# Altium PCB tach key H-4key2.PcbDoc
Units mm, origin at the board's own origin, x right, y up, seen from the top; angles counter-clockwise.
Board outline 264.23 x 97.21 mm, 2 copper layers (Top Layer, Bottom Layer); 83 components, 54 nets, 241 pads, 0 vias.
Unrouted connection lines stored in the file: 12.
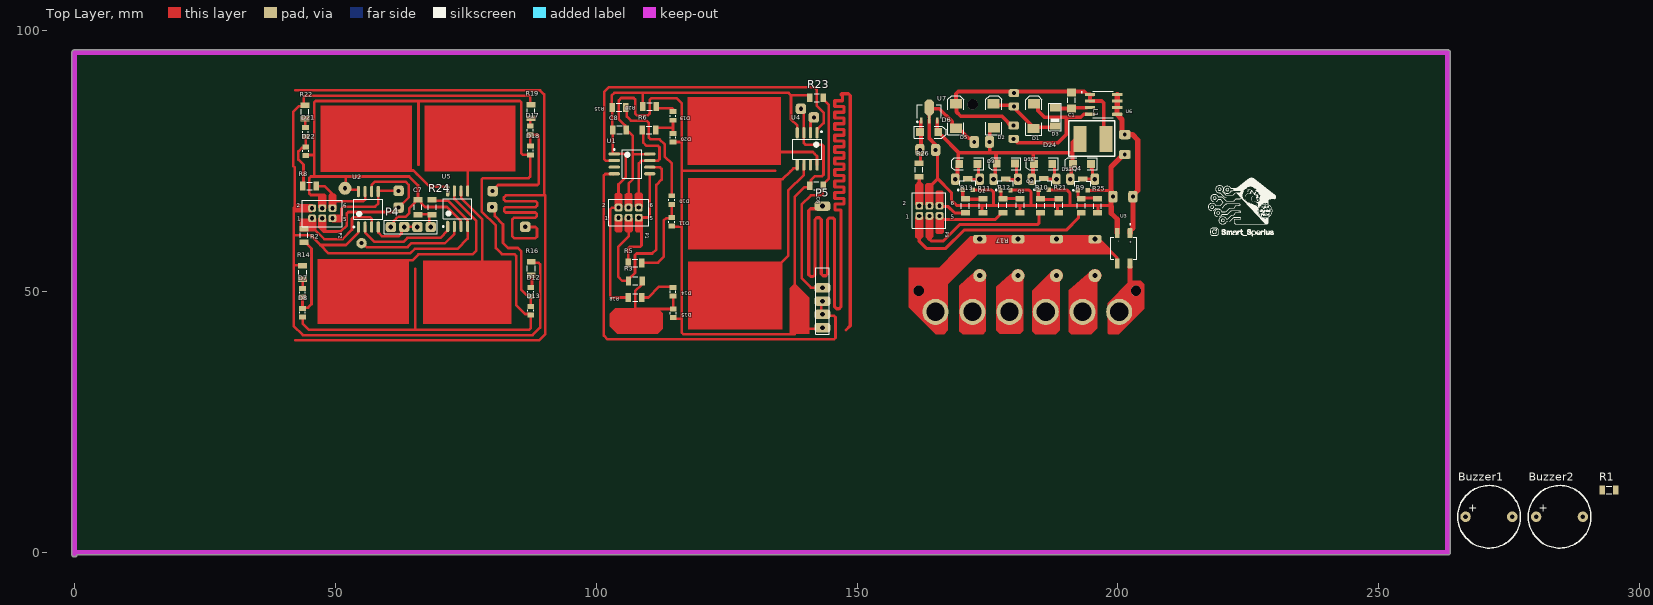
[diagram p0: Top Layer view]
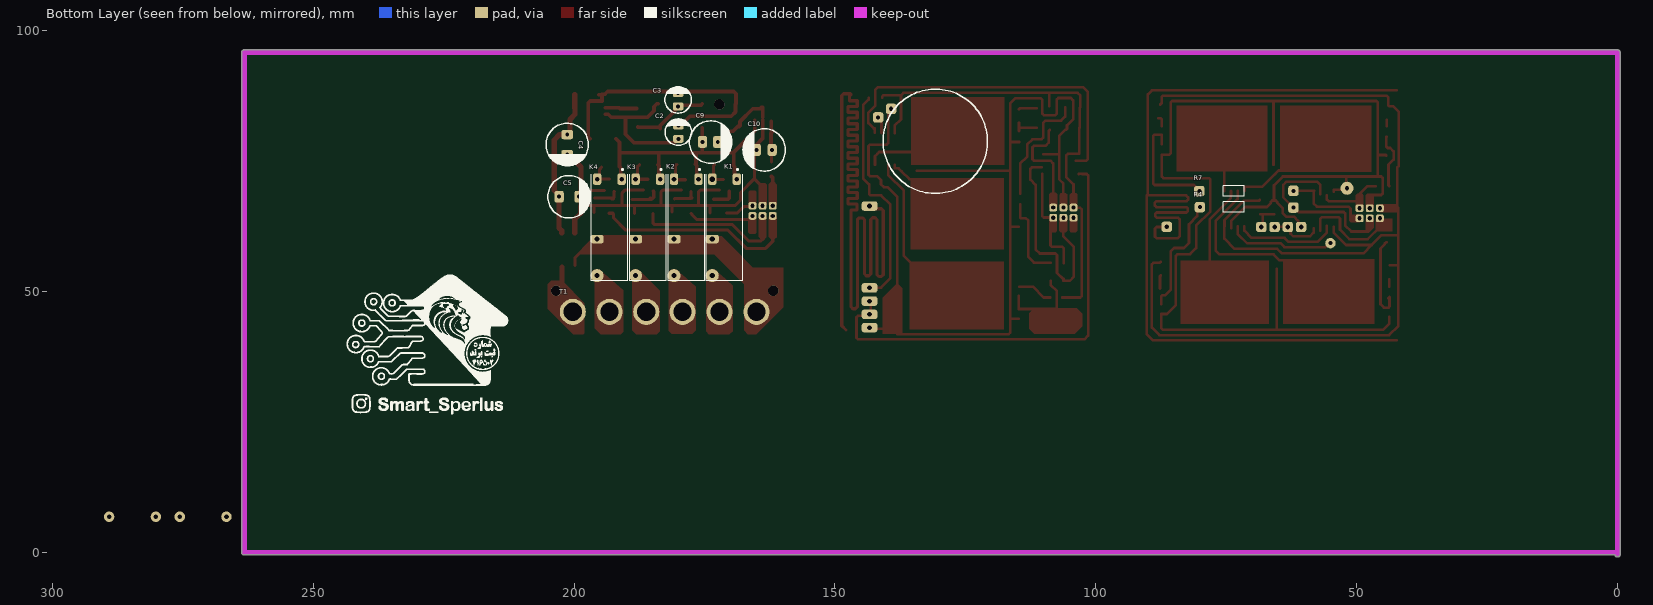
[diagram p1: Bottom Layer view, seen from below]
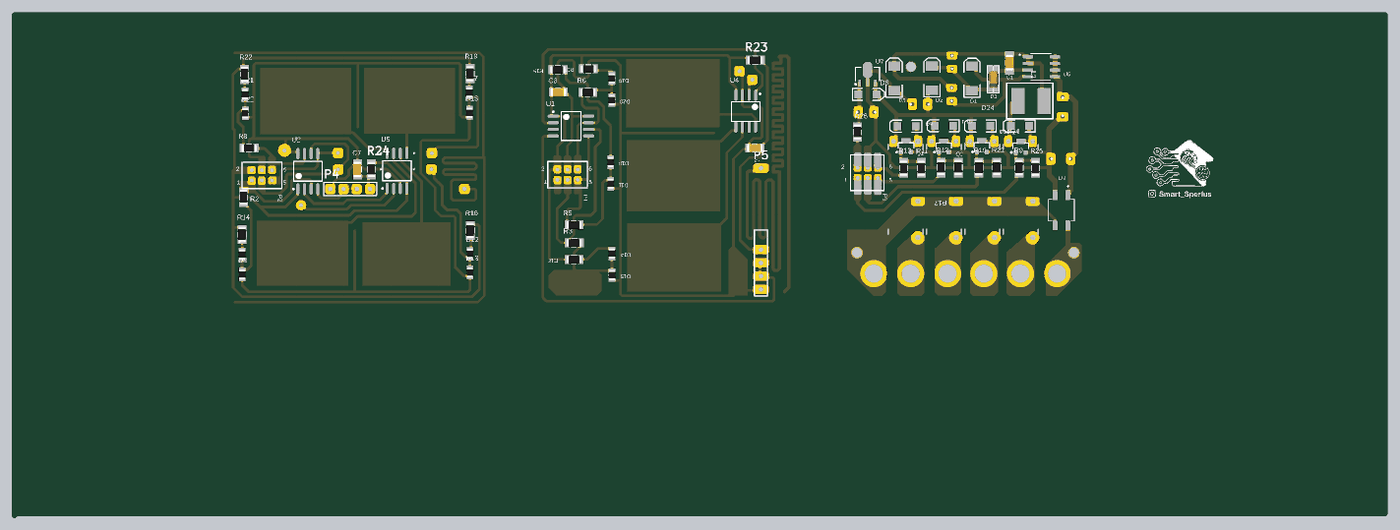
[diagram p2: 3D render of the assembled board from above, using the file's embedded part models]
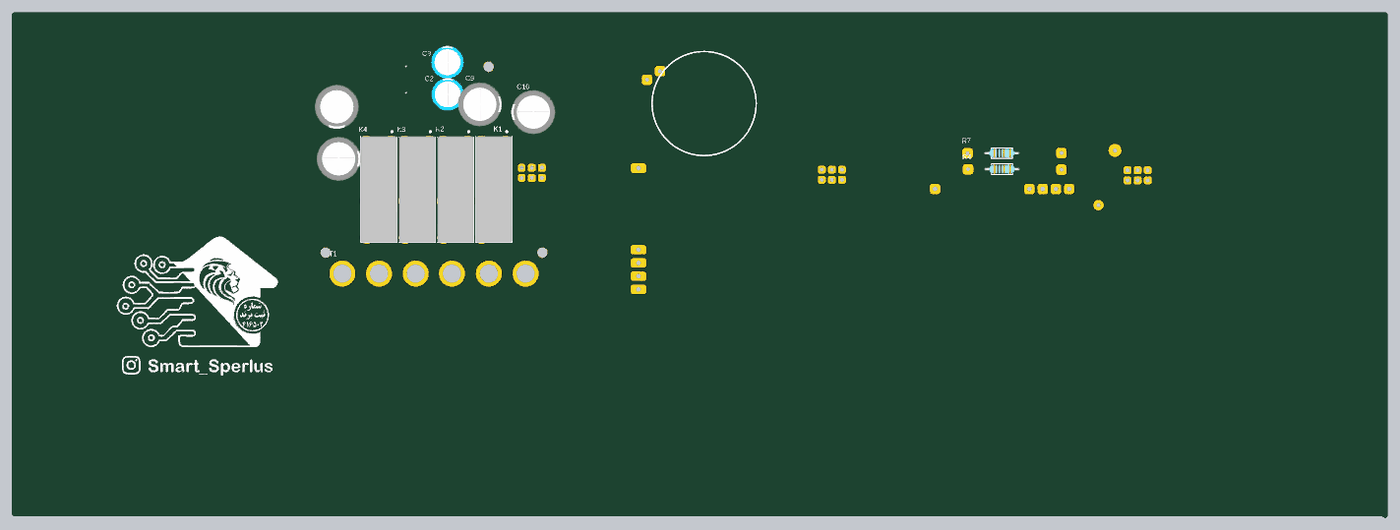
[diagram p3: 3D render of the assembled board from below, using the file's embedded part models]

## Layer stack, top to bottom
Top Solder: solder mask 0.0102, Solder Resist, Dk 3.5
Top Layer: signal copper 0.0356
Dielectric 1: dielectric 0.32, FR-4, Dk 4.8
Bottom Layer: signal copper 0.0356
Bottom Solder: solder mask 0.0102, Solder Resist, Dk 3.5

## Board outline
-0.5,-0.381 -0.5,95.825 cw(c0,95.825) 0,96.325 263.225,96.325 cw(c263.225,95.825) 263.725,95.825 263.725,0 cw(c263.225,0) 263.225,-0.5 0.486,-0.5 cw(c0,-0.381)

## Design rules (kind name [scope] priority, off if disabled: settings)
Clearance Clearance_1 [InPolygon] p1: gap=0.8 ignorepadtopadclearanceinfootprint=FALSE
Clearance [All] p2: gap=0.254 ignorepadtopadclearanceinfootprint=FALSE except(0: Arc-Hole Track-Hole SMDPad-Hole THPad-Hole Via-Hole Fill-Hole Poly-Hole Region-Hole Text-Hole; 0.5: Arc-Arc Arc-Track Arc-SMDPad Arc-THPad Arc-Via Track-Track Track-SMDPad Track-THPad Track-Via SMDPad-SMDPad SMDPad-THPad SMDPad-Via THPad-THPad THPad-Via Via-Via)
PolygonConnect [All] p1: connectstyle=Relief reliefconductorwidth=0.254 reliefentries=4 polygonreliefangle="90 Angle" airgapwidth=0.254
RoomDefinition "tach key H-4key" [InComponentClass('tach key H-4key')] p1: confinementstyle=ConfineIn formatcopy=TRUE lockcomponents=FALSE outline 144.907,-4.953 247.904,-4.953 247.904,23.114 144.907,23.114
RoutingLayers [All] p1: top layer_v5=FALSE bottom layer_v5=TRUE
RoutingVias [All] p1: holewidth=0.711 width=2.5 viastyle="Through Hole" minholewidth=0.711 minwidth=1.27 maxholewidth=0.711 maxwidth=2
SolderMaskExpansion [All] p1: expansion=0.102 istentingtop=FALSE
SupplyNets "Schematic Supply Nets_2" [InNet('GND')] p1: voltage=0.000
SupplyNets "Schematic Supply Nets_1" [InNet('+12v')] p2: voltage=0.000
SupplyNets "Schematic Supply Nets" [InNet('vcc')] p3: voltage=0.000
Width [All] p1: maxlimit=3 minlimit=0.5 preferedwidth=1
29 further rules are at their usual default settings.

## Components (designator, comment, footprint, x,y, rotation, side; value= is the part's Value field where it differs from the comment)
Buzzer1 "Buzzer" BUZZER 271.154,6.825 r0 top
Buzzer2 "Buzzer" BUZZER 284.68,6.825 r0 top
C1 "=Value" "CAP 1206"#1 191.125,86.625 r90 top
C2 "=Value" ELEC-CAP-RAD10-20 180.025,80.55 r270 bottom
C3 "=Value" ELEC-CAP-RAD10-20 180.075,86.75 r270 bottom
C4 "=Value" ELEC-CAP-RAD15-30#1 201.325,78.175 r90 bottom
C5 "=Value" ELEC-CAP-RAD15-30#1 200.975,68.175 r0 bottom
C6 "=Value" "CAP 1206"#2 142.175,70.275 r0 top
C7 "=Value" "CAP 1206"#3 65.85,66.175 r270 top
C8 "=Value" "CAP 1206"#2 104.425,81 r0 top
C9 "=Value" ELEC-CAP-RAD15-30#2 173.85,78.65 r0 bottom
C10 "=Value" ELEC-CAP-RAD15-30#3 163.575,77.15 r180 bottom
D1 "D Schottky" SMB#1 183.9,83.6 r90 top
D2 "D Schottky" SMB#2 176.225,83.625 r90 top
D3 "Zener Diode" DO-35 188.002,85.99 r270 top
D5 "D Schottky" SMB#3 168.95,83.6 r90 top
D6 "D Tunnel1" 3.2X1.6X1.1 163.825,80.575 r0 top
D7 "MODEL" "RES 0805 (2012X06L)" 43.7,49.766 r270 top
D8 "MODEL" "RES 0805 (2012X06L)" 43.725,45.95 r270 top
D9 "D Tunnel1" 3.2X1.6X1.1 171.35,74.45 r180 top
D10 "MODEL" "RES 0805 (2012X06L)" 114.5,67.525 r270 top
D11 "MODEL" "RES 0805 (2012X06L)" 114.5,63.35 r270 top
D12 "MODEL" "RES 0805 (2012X06L)" 87.475,49.9 r270 top
D13 "MODEL" "RES 0805 (2012X06L)" 87.475,46.325 r270 top
D14 "MODEL" "RES 0805 (2012X06L)" 114.75,49.95 r270 top
D15 "MODEL" "RES 0805 (2012X06L)" 114.775,45.825 r270 top
D16 "D Tunnel1" 3.2X1.6X1.1 178.525,74.525 r180 top
D17 "MODEL" "RES 0805 (2012X06L)" 87.35,80.9 r270 top
D18 "MODEL" "RES 0805 (2012X06L)" 87.4,77.025 r270 top
D19 "MODEL" "RES 0805 (2012X06L)" 114.725,83.65 r270 top
D20 "MODEL" "RES 0805 (2012X06L)" 114.725,79.475 r270 top
D21 "MODEL" "RES 0805 (2012X06L)" 44.275,80.575 r270 top
D22 "MODEL" "RES 0805 (2012X06L)" 44.325,76.9 r270 top
D23 "D Tunnel1" 3.2X1.6X1.1 185.675,74.475 r180 top
D24 "D Tunnel1" 3.2X1.6X1.1 193.125,74.475 r180 top
K1 "1-1721081-2" TE_1-1721081-2#1 171.175,62.3 r270 bottom
K2 "1-1721081-2" TE_1-1721081-2#2 178.5,62.3 r270 bottom
K3 "1-1721081-2" TE_1-1721081-2#2 185.875,62.3 r270 bottom
K4 "1-1721081-2" TE_1-1721081-2#2 193.25,62.3 r270 bottom
L1 "1mH" HS1101 195.25,79.275 r0 top
P1 "Header 3X2" HDR2X3 103.685,63.85 r0 top
P2 "Header 3X2" HDR2X3 44.96,63.735 r0 top
P3 "Header 3X2" HDR2X3 161.335,64.21 r0 top
P4 "Header 5" HDR1X5#1 60.65,62.375 r0 top
P5 "Header 5" HDR1X5#2 143.375,43.085 r90 top
Q1 "QNPN" SOT-23B_L 171.225,70.55 r90 top
Q2 "QNPN" SOT-23B_L 178.475,70.525 r90 top
Q3 "QNPN" SOT-23B_L 185.8,70.575 r90 top
Q4 "QNPN" SOT-23B_L 193.275,70.475 r90 top
R1 "10K" "RES 1206 (3216X08L)"#1 294.13,11.95 r0 top
R2 "10K" "RES 1206 (3216X08L)"#1 44,60.776 r90 top
R3 "10K" "RES 1206 (3216X08L)"#1 107.5,52.05 r180 top
R4 "10K" Res-(1/4)#1 73.55,66.2 r180 bottom
R5 "10K" "RES 1206 (3216X08L)"#1 107.455,55.475 r180 top
R6 "10K" "RES 1206 (3216X08L)"#1 110.13,80.975 r180 top
R7 "10K" Res-(1/4)#2 73.585,69.275 r180 bottom
R8 "10K" "RES 1206 (3216X08L)"#1 45.05,70.225 r0 top
R9 "10K" "RES 1206 (3216X08L)"#2 192.975,66.475 r270 top
R10 "10K" "RES 1206 (3216X08L)"#2 185.2,66.475 r270 top
R11 "10K" "RES 1206 (3216X08L)"#3 174.15,66.375 r270 top
R12 "10K" "RES 1206 (3216X08L)"#4 177.95,66.525 r270 top
R13 "10K" "RES 1206 (3216X08L)"#5 170.78,66.4 r270 top
R14 "10K" "RES 1206 (3216X08L)"#1 43.725,53.625 r90 top
R15 "10K" "RES 1206 (3216X08L)"#1 104.375,85.3 r180 top
R16 "10K" "RES 1206 (3216X08L)"#1 87.55,54.4 r90 top
R17 "10K" "RES 1206 (3216X08L)"#4 181.275,66.525 r270 top
R18 "10K" "RES 1206 (3216X08L)"#1 107.48,48.85 r180 top
R19 "10K" "RES 1206 (3216X08L)"#1 87.5,84.55 r90 top
R20 "10K" "RES 1206 (3216X08L)"#1 110.23,85.475 r180 top
R21 "10K" "RES 1206 (3216X08L)"#4 188.675,66.525 r270 top
R22 "10K" "RES 1206 (3216X08L)"#1 44.2,84.4 r90 top
R23 "10K" "RES 1206 (3216X08L)"#1 142.27,87.161 r180 top
R24 "10K" "RES 1206 (3216X08L)"#6 68.55,66.15 r90 top
R25 "10K" "RES 1206 (3216X08L)"#3 196.1,66.375 r270 top
R26 "10K" "RES 1206 (3216X08L)"#1 161.875,73.325 r90 top
T1 "Phoenix terminal" "phoenix terminal 6" 199.116,34.429 r180 bottom
U1 "ATtiny15L-1SC" 8S2_N#1 106.875,74.475 r0 top
U2 "ATtiny15L-1SC" 8S2_N#1 56.325,65.775 r90 top
U3 "MB6S" SOIC245P670X270-4N 201.1,58.3 r270 top
U4 "ATtiny15L-1SC" 8S2_N#2 140.45,77.25 r270 top
U5 "ATtiny15L-1SC" 8S2_N#1 73.445,65.875 r90 top
U6 "HT7A6312" SOIC127P599X175-8N 197.13,85.885 r0 top
U7 "LM1117MP-3.3" SOT89L 163.85,84.475 r90 top

## Footprints (in the part's own frame and the unit in brackets; to place one, negate y for a bottom-side part, rotate by r counter-clockwise, add the part's x,y. Pads: shape width x height; smd on the part's side, far side on the other; paste and mask are expansions set on the pad)
3.2X1.6X1.1 [mm] "SMT LED; 2 Flat Leads"
  rect 1.5x1.5 smd: 1(-1.75,0) 2(1.75,0)
  silkscreen extent -2.9,-1.15 3.27,1.15
8S2_N#1 [mm] "SOP, 8-Leads, Body 5.3x5.3mm, Pitch 1.27mm, IPC Medium Density"
  oval 2.2x0.6 smd: 1(-3.4,1.905) 2(-3.4,0.635) 3(-3.4,-0.635) 4(-3.4,-1.905) 5(3.4,-1.905) 6(3.4,-0.635) 7(3.4,0.635) 8(3.4,1.905)
  silkscreen extent -3.52,-2.75 1.9,2.88, body extent -2.73,-2.75 2.73,2.75, height 2.16
8S2_N#2 [mm] "SOP, 8-Leads, Body 5.3x5.3mm, Pitch 1.27mm, IPC Medium Density"
  oval 2.2x0.6 smd: 1(-3.175,1.905) 2(-3.175,0.635) 3(-3.175,-0.635) 4(-3.175,-1.905) 5(2.975,-1.905) 6(2.975,-0.635) 7(2.975,0.635) 8(2.975,1.905)
  silkscreen extent -3.52,-2.75 1.9,2.88, body extent -2.73,-2.75 2.73,2.75, height 2.16
BUZZER [mm] "BUZZER"
  round 2 hole 0.9: 1(-4.5,0) 2(4.45,0)
  silkscreen extent -6,-6 6,6
"CAP 1206"#1 [mm]
  rect 1.5x1.7 smd: 1(-1.524,0) 2(1.524,0)
  silkscreen extent -0.47,-0.75 0.53,0.75, body extent -1.49,-0.77 1.55,0.75, height 0.75
"CAP 1206"#2 [mm]
  rect 1.05x1.7 smd: 1(-1.27,0) 2(1.326,0)
  silkscreen extent -0.47,-0.75 0.53,0.75, body extent -1.49,-0.77 1.55,0.75, height 0.75
"CAP 1206"#3 [mm]
  rect 1.05x1.7 smd: 1(-1.376,0) 2(1.425,0)
  silkscreen extent -0.47,-0.75 0.53,0.75, body extent -1.49,-0.77 1.55,0.75, height 0.75
DO-35 [mm]
  rect 1.397x2 smd: 1(0.765,-0.027) 2(4.265,-0.027)
  silkscreen extent -0.07,-1.2 5.15,1.15, body extent -0.17,-0.81 5.35,0.84, height 1.81
ELEC-CAP-RAD10-20 [mil]
  rrect50% 60x80 hole 30: 1(-50,0) 2(50,0)
  silkscreen extent -100,-100 100,100, body extent -124,-124 124,124, height 404
ELEC-CAP-RAD15-30#1 [mil]
  rrect50% 70x90 hole 30: 1(-75,0) 2(75,0)
  silkscreen extent -160,-160 160,160, body extent -167,-167 167,167, height 609
ELEC-CAP-RAD15-30#2 [mil]
  rrect50% 70x90 hole 30: 1(-54.13,-0.98) 2(61.02,-1.97)
  silkscreen extent -160,-160 160,160, body extent -167,-167 167,167, height 609
ELEC-CAP-RAD15-30#3 [mil]
  rrect50% 70x90 hole 30: 1(-59.06,0) 2(60.04,0)
  silkscreen extent -160,-160 160,160, body extent -167,-167 167,167, height 609
HDR1X5#1 [mm] "Connector; Header; 5 Position"
  rrect50% 2x2 hole 0.9: 1(0,0) 2(2.54,0) 3(5.08,0) 4(7.62,0) 5(25.755,0.025)
  silkscreen extent -1.27,-1.27 8.89,1.27
HDR1X5#2 [mm] "Connector; Header; 5 Position"
  rrect50% 1.8x3 hole 0.9: 1(0,0) 2(2.54,0) 3(5.08,0) 4(7.62,0) 5(23.3,0)
  silkscreen extent -1.27,-1.27 11.43,1.27
HDR2X3 [mm] "Connector; Header; 3x2 Position"
  rrect50% 1.5x1.5 hole 0.8: 1(0.6,0.3) 2(0.6,2.24) 3(2.54,0.3) 4(2.54,2.24) 5(4.48,0.3) 6(4.48,2.24)
  silkscreen extent -1.27,-1.27 6.35,3.81
HS1101 [mm] "HUMIDITY SENSOR"
  rect 2.5x5 smd: 1(2.5,0) 2(-2.5,0)
"phoenix terminal 6" [mm] "6 terminals"
  round 5 hole 3.5: 1(-1.143,11.684) 2(5.897,11.684) 3(12.937,11.684) 4(19.897,11.684) 5(26.997,11.684) 6(34.057,11.684)
"RES 0805 (2012X06L)" [mm] "Chip Resistor, 2-Leads, Body 2.0x1.3mm, IPC High Density _ (0.100 W)"
  rect 0.95x1.3 smd: 1(-0.838,0) 2(0.812,0)
  silkscreen extent -0.16,-0.55 0.14,0.55, body extent -1.03,-0.63 1,0.64, height 0.6
"RES 1206 (3216X08L)"#1 [mm] "Chip Resistor, 2-Leads, Body 3.2x1.6mm, IPC High Density _ (0.125 W)"
  rect 1.05x1.7 smd: 1(-1.295,0) 2(1.301,0)
  silkscreen extent -0.5,-0.75 0.5,0.75, body extent -1.52,-0.76 1.53,0.76, height 0.6
"RES 1206 (3216X08L)"#2 [mm] "Chip Resistor, 2-Leads, Body 3.2x1.6mm, IPC High Density _ (0.125 W)"
  rect 1.05x1.7 smd: 1(-1.325,0) 2(1.401,0)
  silkscreen extent -0.5,-0.75 0.5,0.75, body extent -1.52,-0.76 1.53,0.76, height 0.6
"RES 1206 (3216X08L)"#3 [mm] "Chip Resistor, 2-Leads, Body 3.2x1.6mm, IPC High Density _ (0.125 W)"
  rect 1.05x1.7 smd: 1(-1.425,0) 2(1.301,0)
  silkscreen extent -0.5,-0.75 0.5,0.75, body extent -1.52,-0.76 1.53,0.76, height 0.6
"RES 1206 (3216X08L)"#4 [mm] "Chip Resistor, 2-Leads, Body 3.2x1.6mm, IPC High Density _ (0.125 W)"
  rect 1.05x1.7 smd: 1(-1.275,0) 2(1.451,0)
  silkscreen extent -0.5,-0.75 0.5,0.75, body extent -1.52,-0.76 1.53,0.76, height 0.6
"RES 1206 (3216X08L)"#5 [mm] "Chip Resistor, 2-Leads, Body 3.2x1.6mm, IPC High Density _ (0.125 W)"
  rect 1.05x1.7 smd: 1(-1.4,0) 2(1.326,0)
  silkscreen extent -0.5,-0.75 0.5,0.75, body extent -1.52,-0.76 1.53,0.76, height 0.6
"RES 1206 (3216X08L)"#6 [mm] "Chip Resistor, 2-Leads, Body 3.2x1.6mm, IPC High Density _ (0.125 W)"
  rect 1.05x1.7 smd: 1(-1.4,0) 2(1.401,0)
  silkscreen extent -0.5,-0.75 0.5,0.75, body extent -1.52,-0.76 1.53,0.76, height 0.6
Res-(1/4)#1 [mm]
  rrect50% 2x2 hole 0.762: 1(-6.525,-0.025) 2(11.425,-0.1)
  silkscreen extent -2.03,-1.02 2.03,1.02, body extent -3.43,-0.92 3.43,0.91, height 2.92
Res-(1/4)#2 [mm]
  rrect50% 2x2 hole 0.762: 1(-6.575,-0.025) 2(11.46,0.025)
  silkscreen extent -2.03,-1.02 2.03,1.02, body extent -3.43,-0.92 3.43,0.91, height 2.92
SMB#1 [mm] "DO-214-AA/SMB; 2 C-Bend Leads; Body 5.3 x 3.6 mm, inc. leads (LxW)"
  rect 1.8x2.3 smd: 1(-2.35,0.025) 2(2.375,0)
  silkscreen extent -3.6,-1.55 3.9,1.55
SMB#2 [mm] "DO-214-AA/SMB; 2 C-Bend Leads; Body 5.3 x 3.6 mm, inc. leads (LxW)"
  rect 1.8x2.3 smd: 1(-2.254,0) 2(2.371,0.025)
  silkscreen extent -3.58,-1.55 3.95,1.55
SMB#3 [mm] "DO-214-AA/SMB; 2 C-Bend Leads; Body 5.3 x 3.6 mm, inc. leads (LxW)"
  rect 1.8x2.3 smd: 1(-2.325,-0.05) 2(2.375,-0.025)
  silkscreen extent -3.57,-1.55 3.95,1.55
SOIC127P599X175-8N [mm]
  rrect25% 1.97x0.6 smd: 1(-2.47,1.905) 2(-2.47,0.635) 3(-2.47,-0.635) 4(-2.47,-1.905) 5(2.745,-1.905) 6(2.745,-0.635) 7(2.745,0.635) 8(2.745,1.905)
  silkscreen extent -4.14,-2.52 1.95,2.52
SOIC245P670X270-4N [mm]
  rrect23% 1.91x0.91 smd: 1(-2.9,1.225) 2(-2.9,-1.225) 3(2.9,-1.225) 4(2.9,1.225)
  silkscreen extent -4.68,-2.48 2.1,2.48
SOT89L [mm] "SOT89, 3-Leads, Body 4.5x2.4 mm, Pitch 1.5mm, Lead Span 4.1mm, IPC High Density"
  rect 1.2x0.5 smd: 1(-1.7,1.5) 3(-1.7,-1.5)
  rect 1.6x0.5 smd: 2(-1.5,0)
  oct 3x1.8 smd: 2(0.8,0)
  silkscreen extent -2.07,-2.3 1.3,2.42, body extent -1.3,-2.3 1.3,2.3, height 1.6
SOT-23B_L [mm] "SOT23, 3-Leads, Body 2.9x1.3mm, Pitch 0.95mm, Lead Span 2.4mm, IPC High Density"
  rect 0.85x0.8 smd: 1(-1.075,0.95) 2(-1.075,-0.95)
  rect 1x1.8 smd: 3(1.075,0)
  silkscreen extent -1.2,-1.5 0.7,1.92, body extent -0.7,-1.5 0.7,1.5, height 1.14
TE_1-1721081-2#1 [mm]
  rrect50% 2.2x1.6 hole 0.9 mask+0.102: 1(-9.25,2.35)
  rrect50% 2.2x1.6 hole 1.1 mask+0.102: 2(-9.25,-2.35)
  rrect50% 1.6x2.5 hole 1 mask+0.102: 3(2.25,-2.35)
  round 2.5 hole 1 mask+0.102: 4(9.25,-2.35)
  silkscreen extent -11.24,-3.5 10.2,3.5, body extent -10.2,-3.5 10.2,3.5, height 14.5
TE_1-1721081-2#2 [mm]
  rrect50% 2.2x1.6 hole 0.9 mask+0.102: 1(-9.25,2.35) 2(-9.25,-2.35)
  rrect50% 1.6x2.5 hole 1 mask+0.102: 3(2.25,-2.35)
  round 2.5 hole 1 mask+0.102: 4(9.25,-2.35)
  silkscreen extent -11.24,-3.5 10.2,3.5, body extent -10.2,-3.5 10.2,3.5, height 14.5

## Part data
C1 C6 C7 C8: library part Capacitor, "Capacitor"
C2 C3 C4 C5 C9 C10: library part "Capacitor Electrolytic", "Electrolytic Capacitor"
D1 D2 D5: "Schottky Diode", Code_JEDEC=DO-214-AA, LatestRevisionDate=17-Jul-2002, LatestRevisionNote="Re-released for DXP Platform.", PackageDescription="DO-214-AA/SMB; 2 C-Bend Leads; Body 5.3 x 3.6 mm, inc. leads (LxW)", PackageReference=SMB, Published=8-Jun-2000, Publisher="Altium Limited", Simulation ModelName=SKYDIODE, Simulation PortMap=(1:1),(2:2)
D6 D9 D16 D23 D24: "Tunnel Diode - RLC Model", LatestRevisionDate=17-Jul-2002, LatestRevisionNote="Re-released for DXP Platform.", PackageDescription="SM LED; 2 Flat Leads", PackageReference=3.2X1.6X1.1, PackageVersion=Feb-2002, Published=8-Jun-2000, Publisher="Altium Limited", Simulation ModelName=DTUNNEL1, Simulation PortMap=(1:1),(2:2)
D7 D8 D10 D11 D12 D13 D14 D15 D17 D18 D19 D20 D21 D22: library part "LED 5mm", "Typical LED", COLOR=RED
K1 K2 K3 K4: "General Purpose Relay SPST-NO (1 Form A) 12VDC Coil Through Hole", Package=None, Check_prices=https://www.snapeda.com/parts/1-1721081-2/TE+Connectivity+Potter+%2526+Brumfield+Relays/view-part/?ref=eda, MF="TE Connectivity", MP=1-1721081-2, SnapEDA_Link=https://www.snapeda.com/parts/1-1721081-2/TE+Connectivity+Potter+%2526+Brumfield+Relays/view-part/?ref=snap
L1: library part Inductor, "Inductor", Code_IEC=1005, Code_JEITA=0402, LatestRevisionDate=17-Jul-2002, LatestRevisionNote="Re-released for DXP Platform.", PackageReference=0402-A, Published=8-Jun-2000, Publisher="Altium Limited", Simulation ModelName=INDUCTOR, Simulation PortMap=(1:1),(2:2)
P1 P2 P3: "Header, 3-Pin, Dual row", LatestRevisionDate=17-Jul-2002, LatestRevisionNote="Re-released for DXP Platform.", Publisher="Altium Limited"
P4 P5: "Header, 5-Pin", LatestRevisionDate=17-Jul-2002, LatestRevisionNote="Re-released for DXP Platform.", Publisher="Altium Limited"
Q1 Q2 Q3 Q4: "NPN Bipolar Transistor", LatestRevisionDate=29-May-2009, LatestRevisionNote="IPC-7351 Footprint Added.", PackageDescription="3-Pin SOT-23 Package 0.95 mm Pitch, 2.4 mm Lead Span", PackageReference=SOT-23B, PackageVersion=Aug-1999, Published=8-Jun-2000, Publisher="Altium Limited", Simulation ModelName=QNPN, Simulation PortMap=(1:1),(2:2),(3:3)
R1 R2 R3 R4 R5 R6 R7 R8 R9 R10 R11 R12 R13 R14 R15 R16 R17 R18 R19 R20 R21 R22 R23 R24 R25 R26: library part Resistor, "Resistor", Power="1/4 W", Tolerance=5%, Simulation ModelName="Model Name", Simulation PortMap=(1:1),(2:2)
T1: library part "Phoenix terminal 6", "Terminal 6 Pin", ComponentLinkURL=www.picpars.com, Designer="Seyed Mohsen Ghasemain", E-mail=picpars@gmail.com
U1 U2 U4 U5: "8-Bit AVR Microcontroller with 1K Byte of Flash Memory", Supplier Part Number 1=ATTINY15L-1SC-ND, ComponentLink1Description=Datasheet, ComponentLink1URL=http://www.atmel.com/dyn/resources/prod_documents/doc1187.pdf, ComponentLink2Description="Atmel.com Home", ComponentLink2URL=http://www.atmel.com, DatasheetVersion=1187E-AVR-06/02, LatestRevisionDate=16-Oct-2006, LatestRevisionNote="IPC-7351 Footprint Added.", PackageDescription="8-Lead, 0.208\" Body, Plastic Small Outline Package (EIAJ)", PackageReference=8S2, PackageVersion="revF, Apr-2008", Published=17-Sep-2003, Publisher="Altium Limited", Supplier 1=Digi-Key, Supplier 2=Mouser, Supplier Part Number 2=556-ATTINY15L1SC
U3: "Bridge Rectifier Single Phase Standard 600V Surface Mount 4-SOIC", Package="BESOP-4 Surge Components", Digi-Key_Part_Number=MB6SCT-ND, Digi-Key_Purchase_URL=https://www.digikey.com.tr/product-detail/en/on-semiconductor/MB6S/MB6SCT-ND/965654?utm_source=snapeda&utm_medium=aggregator&utm_campaign=symbol, MF="ON Semiconductor", MP=MB6S, SnapEDA_Link=https://www.snapeda.com/parts/MB6S/ON%20Semiconductor/view-part/2774209/?ref=snap
U6: library part Component_1
U7: "800mA Low-Dropout Linear Regulator", DigiKeyPartNumber=LM1117MP-3.3CT-ND, Manufacturer="National Semiconductor", PackageTopMarking=XYTT*N05A, PowerWise=N, Code_IPC=SOT223-4, Code_JEDEC=TO-261-AA, ComponentLink1Description="LM1117 Datasheet", ComponentLink1URL=http://www.national.com/ds/LM/LM1117.pdf, ComponentLink2Description="LM1117 Web Page", ComponentLink2URL=http://www.national.com/pf/LM/LM1117.html, ComponentLink3Description="MP04A Package Page", ComponentLink3URL=http://www.national.com/packaging/folders/mp04a.html, CompType="LDO IC", DatasheetVersion=Apr-2006, PackageDescription="Molded SOT-223, 6.50 x 3.56 x 1.6mm Body, 4 Lead, 2.3mm Pitch", PackageReference=MP04A, PackageVersion="revB, Apr-2003", PartNumber=LM1117MP-3.3, PinCount=4, Published=4-Dec-2008, Publisher="Altium Limited", RoHS=O
Buzzer1 Buzzer2: ComponentLinkURL=www.picpars.com, Designer="Seyed Mohsen Ghasemain"
D3: MODEL=1N

## Free pads (board coordinates)
  round 2 hole 2: 156(161.825,50.15) 156(172.175,85.875) 157(203.475,50.15)
  round 2 hole 0.8: 158(55.025,59.275)
  round 2.5 hole 0.8: 159(51.85,69.8)
  rrect50% 2x2 hole 0.8: 160(139.25,85.025) 161(141.725,83.375)

## Nets (pads, with @x,y where several pads share a name; then routed paths per layer and width w, separated by ;. In a path a pad name is that pad's centre, name@x,y a point inside that pad or via, vN(x,y) a via of type N, cw(c..) or ccw(c..) an arc to the next point about the centre after c; other vN are vias at no path point)
+12v: C9.2 D2.1 D6.2 D9.2 D16.2 D23.2 D24.2 K1.1 K2.1 K3.1 K4.1 L1.2 U7.3 | length 57.6
  Top Layer w0.7: U7.3 165.35,80.8 D6.2 ; D6.2@166.175,79.95 169.55,76.575 175.475,76.575 176.65,76.575 ; K1.1 169.25,71.975 169.25,73.925 D9.2@169.625,74.3 ; D9.2@169.375,74.3 169.375,76.75 ; C9.2 175.475,78.625 175.475,76.625 ; D2.1@175.45,81.371 175.475,81.346 C9.2@175.475,79.1 ; K2.1 176.5,71.9 176.5,74.075 176.8,74.375 176.65,74.525 176.65,76.575 ; K3.1 183.725,71.75 183.725,74.1 183.95,74.325 183.775,74.5 183.775,76.575 ; K4.1 191.062,71.712 191.062,73.712 191.225,73.875 191.3,73.95 191.3,76.575 ; L1.2@191.975,79.3 191.3,78.625 191.3,76.575 ; 176.65,76.575 183.775,76.575 ; 183.775,76.575 191.3,76.575
biz1: Buzzer1.1 pad.158 U5.2 | length 20.5
  Top Layer w0.5: pad.158 56,58.525 63.825,58.525 64.525,59.225 70.975,59.225 72.81,61.06 U5.2
biz2: pad.161 R1.2 U4.2 | length 3.2
  Top Layer w0.6: U4.2 141.085,82.535 141.4,82.85 pad.161
data: U1.2 U4.1 | length 66.1
  Top Layer w0.5: U1.2@103.819,75.091 102.585,75.091 102.579,75.085 101.818,75.085 101.525,75.378 101.525,88.25 102.45,89.175 141.787,89.175 142.27,88.692 142.27,85.63 143.6,84.3 143.6,82.275 142.569,81.244 142.401,81.244 142.355,81.198 U4.1
data2: U2.2 U5.1 | length 19.5
  Top Layer w0.5: U2.2@55.709,62.634 55.709,61.291 57.425,59.575 63.125,59.575 63.825,60.275 70.125,60.275 71.54,61.69 U5.1
faz: K1.3 K2.3 K3.3 K4.3 T1.6 U3.3 | length 47
  Top Layer w0.6: K4.3 196.038,59.612 196.713,59.612 199.825,56.5 U3.3@199.825,55.05
  Top Layer w1.6: T1.6 165.059,52.234 172.875,60.05 K1.3 K2.3 K3.3 K4.3
GND: Buzzer1.2 Buzzer2.2 C4.1 C5.1 C6.1 C7.1 C8.2 C9.1 C10.1 D5.1 D8.2 D11.2 D13.2 D15.2 D18.2 D20.2 D22.2 P1.4 P2.4 P3.4 P4.1 P5.1 pad.159 pad.160 Q1.2 Q2.2 Q3.2 Q4.2 R11.2 R17.2 R21.2 R25.2 U1.8 U2.8 U3.2 U4.3 U5.3 U7.2 | length 545.3
  Top Layer w0.5: D8.2 43.725,43.9 44.975,42.65 65.325,42.65 ; D22.2 44.418,76.181 45.95,76.181 ; P2.4@47.35,65.998 47.35,68.207 47.057,68.5 45.322,68.5 45.03,68.793 45.03,71.757 45.322,72.05 45.95,72.05 ; U2.8 54.42,69.454 54.374,69.5 52.893,69.5 52.88,69.513 52.137,69.513 pad.159 52.025,69.975 52.025,72.05 ; P4.1@60.59,62.45 61.234,63.094 61.234,63.559 62.025,64.35 63.525,64.35 64.2,65.025 64.2,66 65.25,67.05 65.25,67.17 65.525,67.445 C7.1@65.85,67.445 ; 65.325,54.341 65.325,42.65 ; 65.95,74.285 65.95,86.525 ; U5.3@74.061,62.102 74.061,63.539 71.4,66.2 67.2,66.2 66.45,66.95 66.45,67.17 66.175,67.445 C7.1@65.85,67.445 ; D18.2@87.35,75.963 87.35,72.043 87.057,71.75 78.343,71.75 78.05,71.457 78.05,65.364 80.775,62.639 80.775,58.325 81.95,57.15 84.382,57.15 84.675,56.857 84.675,47.375 86.35,45.7 D13.2@87.475,45.7 ; D18.2 87.225,76.213 87.214,76.203 85.943,76.203 85.65,76.496 85.65,86.232 85.357,86.525 65.95,86.525 ; D13.2 87.475,42.968 87.157,42.65 65.325,42.65 ; C8.2 105.526,81.225 105.526,81.849 104.35,83.025 104.35,86.649 104.801,87.1 107.182,87.1 107.475,86.807 107.475,84.126 107.826,83.775 109.895,83.775 110.246,84.126 110.246,86.682 110.639,87.075 115.4,87.075 116.37,86.105 116.37,78.675 ; C8.2@105.776,81.025 107.025,79.776 107.025,76.345 ; P1.4 106.225,70.725 107.025,71.525 107.025,76.345 ; U1.8@110.05,76.345 107.025,76.345 ; D20.2@114.643,78.675 116.37,78.675 ; D11.2@114.784,62.45 116.37,62.45 ; D15.2@114.827,44.788 115.467,44.788 115.468,44.787 116.37,44.787 ; 134.35,73.125 116.37,73.125 ; pad.160 139.815,84.46 U4.3 ; U4.3@139.8,80.425 139.8,78.468 140.093,78.175 143.282,78.175 143.575,77.882 143.575,72.418 143.282,72.125 141.95,72.125 141.18,71.355 141.18,70.55 140.653,70.023 139.923,70.023 138.075,68.175 138.075,42.9 ; P5.1 143.19,42.9 138.075,42.9 ; 45.95,72.05 45.95,76.181 ; 45.95,72.05 52.025,72.05 ; 45.95,76.181 45.95,86.232 46.243,86.525 65.95,86.525 ; 52.025,72.05 64.164,72.05 65.85,70.364 C7.1 C7.1@65.85,67.445 ; 116.37,44.787 116.4,44.817 116.4,42.143 116.693,41.85 138.075,41.85 138.075,42.9 ; 116.37,44.787 116.37,62.024 116.37,62.45 ; 116.37,62.45 116.37,73.125 ; 116.37,73.125 116.37,78.675
  Top Layer w0.6: P3.4@164.025,66.475 164.025,70.2 165.45,71.625 ; C10.1@165.45,77.15 165.45,71.625 ; Q1.2 175.799,69.475 176.15,69.124 176.15,66.475 ; R11.2@173.95,65.075 173.95,66.475 ; Q2.2 182.999,69.45 183.35,69.099 183.35,66.475 ; R17.2@181.275,65.224 181.275,66.475 ; Q3.2 190.175,69.5 190.85,68.825 190.85,66.475 ; R21.2@188.4,65.016 188.4,66.475 ; Q4.2 198.7,69.4 ; R25.2@196.175,65.153 196.175,66.475 ; 198.7,66.475 196.175,66.475 ; C5.1@198.7,69.2 199.07,69.2 C5.1 ; 165.45,71.625 168.125,68.95 168.125,67.525 169.175,66.475 173.95,66.475 ; 173.95,66.475 176.15,66.475 ; 176.15,66.475 181.275,66.475 ; 181.275,66.475 183.35,66.475 ; 183.35,66.475 188.4,66.475 ; 188.4,66.475 190.85,66.475 ; 190.85,66.475 196.175,66.475
  Top Layer w0.7: U7.2@163.85,83.425 U7.2@163.85,85.275 ; U7.2@163.875,82.95 163.875,79.35 164.969,78.256 164.969,77.631 C10.1@165.45,77.15 ; U7.2@164.075,85.325 164.365,85.035 165.74,85.035 168.2,82.575 168.2,81.825 D5.1@168.375,81.65 ; D5.1@168.6,81.675 D5.1 169.55,80.725 170.077,80.725 171.393,79.41 171.943,79.41 172.425,78.928 C9.1@172.425,78.377
  Top Layer w1: U3.2 199.875,63.85 198.731,64.994 198.731,66.294 198.7,66.325 198.7,66.475 198.7,69.2 198.7,69.4 198.7,73.899 200.682,75.881 200.9,76.099 C4.1@200.9,76.295
NetBuzzer2_1: Buzzer2.1 R1.1
NetC1_1: C1.1 D3.1 U6.3 | length 6.1
  Top Layer w0.7: D3.1@187.982,85.101 191.225,85.101 191.374,85.25 U6.3@194.025,85.25
NetC1_2: C1.2 C2.1 C3.1 D5.2 L1.1 U6.1 U6.2 | length 53.2
  Top Layer w0.7: C2.1@179.413,81.995 179.238,81.995 179.003,82.23 179.003,82.405 177.808,83.6 169.9,83.6 169.065,84.435 169.065,85.885 D5.2 168.975,87.94 169.385,88.35 179.72,88.35 180.125,87.945 180.53,88.35 193.565,88.35 194.025,87.89 194.025,87.84 194.61,87.84 194.71,87.74 U6.1@195.295,87.74 ; U6.1 U6.2 196.915,86.52 197.325,86.11 197.325,79.65 L1.1@196.975,79.3
NetC2_2: C2.2 D1.2 U6.4 | length 26.7
  Top Layer w0.7: C2.2@179.65,79.455 179.887,79.455 180.297,79.045 180.297,78.979 180.726,78.55 188.55,78.55 190.15,80.15 190.15,83.4 ; D1.2 184.142,85.975 184.692,85.425 184.692,84.633 185.925,83.4 190.15,83.4 ; U6.4@194.025,83.98 193.488,83.98 192.908,83.4 190.15,83.4
NetC3_2: C3.2 D1.1 D2.2 D3.2 | length 14.6
  Top Layer w0.7: D2.2@175.425,85.996 175.696,85.725 179.405,85.725 179.675,85.455 179.912,85.455 180.341,85.026 180.341,85.009 183.5,81.85 D1.1@183.5,81.5 ; D1.1@183.5,81.25 183.75,81.5 187.75,81.5 D3.2@187.806,81.556
NetC4_2: C4.2 C5.2 U3.1 U6.5 U6.6 U6.7 U6.8 | length 29.8
  Top Layer w1: U6.6@199.82,85.25 199.82,83.98 200.803,82.997 200.803,80.104 202.792,80.104 203.825,79.072 203.825,69.374 C5.2@202.88,68.429 ; U6.6 U6.8 ; U3.1 202.37,61.245 202.37,61.655 202.88,62.165 C5.2
NetD7_1: D7.1 R14.1 | length 1.9
  Top Layer w0.5: D7.1@43.75,50.897 R14.1@43.75,51.93 ; R14.1@43.75,51.93 43.75,52.387 R14.1@43.75,51.93
NetD9_1: D9.1 K1.2 Q1.3 | length 4.8
  Top Layer w0.6: Q1.3@171.415,71.505 K1.2@173.3,71.505 ; D9.1@173.125,74.3 173.3,74.125 173.3,71.775 K1.2
NetD10_1: D10.1 R15.1 | length 22.8
  Top Layer w0.5: R15.1@105.895,85.275 105.895,83.53 106.675,82.75 109.657,82.75 110.104,82.303 110.104,79.496 110.425,79.175 112.175,79.175 113.175,78.175 113.175,75.825 114.5,74.5 D10.1@114.5,68.801
NetD12_1: D12.1 R16.1 | length 2.6
  Top Layer w0.5: R16.1 87.7,52.955 D12.1@87.7,50.577
NetD14_1: D14.1 R18.1 | length 6.7
  Top Layer w0.5: R18.1 110,48.85 112.075,50.925 D14.1@114.652,50.925
NetD16_1: D16.1 K2.2 Q2.3 | length 5.3
  Top Layer w0.6: Q2.3@178.663,71.437 180.737,71.437 K2.2 180.6,71.8 180.6,74.075 D16.1@180.3,74.375
NetD17_1: D17.1 R19.1 | length 2
  Top Layer w0.5: D17.1 87.35,82.98 87.625,83.255 R19.1@88.023,83.255
NetD19_1: D19.1 R20.1 | length 3.5
  Top Layer w0.5: R20.1@111.309,85.17 114.5,85.17 D19.1@114.725,84.945
NetD21_1: D21.1 R22.1 | length 1.2
  Top Layer w0.5: D21.1@44.225,81.667 R22.1@44.225,82.88
NetD23_1: D23.1 K3.2 Q3.3 | length 5.2
  Top Layer w0.6: Q3.3@185.9,71.525 185.913,71.537 188.212,71.537 K3.2 ; D23.1@187.45,74.325 187.875,73.9 187.875,72.111 K3.2@188.225,71.761
NetD24_1: D24.1 K4.2 Q4.3 | length 5
  Top Layer w0.6: Q4.3 K4.2 195.6,71.868 195.124,72.343 195.124,73.476 D24.1@194.725,73.875
NetP3_1: P3.1 R9.2 | length 40
  Top Layer w0.6: P3.1 161.935,59.64 163.3,58.275 167,58.275 170.5,61.775 190.1,61.775 192.463,64.138 192.463,64.849 192.612,64.998 R9.2@193.323,64.998
NetP3_3: P3.3 R10.2 | length 28.8
  Top Layer w0.6: P3.3 163.875,60.051 164.226,59.7 166.525,59.7 169.65,62.825 184.549,62.825 184.9,63.176 R10.2@184.9,64.922
NetP3_5: P3.5 R12.2 | length 12.7
  Top Layer w0.6: P3.5@165.79,64.135 P3.5@165.831,64.135 ; P3.5@165.856,64.51 166.591,63.775 176.45,63.775 177.4,64.725 177.4,64.849 177.501,64.95 R12.2@177.625,64.95
NetP3_6: P3.6 R13.2 | length 5.5
  Top Layer w0.6: P3.6 165.98,66.285 167.49,66.285 168.701,65.074 R13.2
nol: T1.1 U3.4 | length 9.4
  Top Layer w1: T1.1 200.259,46.981 201.976,48.699 201.976,49.527 201.975,49.529 201.975,50.771 202.35,51.146 U3.4@202.35,54.653
o1: P1.6 R6.2 U1.7 | length 21.1
  Top Layer w0.5: P1.6@108.175,66.075 108.175,74.575 108.694,75.094 U1.7@110.05,75.094 ; R6.2 109.025,80.779 109.025,78.55 109.65,77.925 111.857,77.925 112.15,77.632 112.15,75.368 111.857,75.075 111.181,75.075 111.165,75.091 U1.7@110.066,75.091
o2: P1.5 R5.2 U1.5 | length 21.4
  Top Layer w0.5: R5.2@106.125,55.39 106.125,58.282 106.418,58.575 108.407,58.575 108.7,58.868 108.7,63.357 108.588,63.469 108.588,63.727 P1.5 ; P1.5@108.275,64.2 109.982,64.2 110.275,64.493 U1.5
o3: P1.3 R3.2 U1.6 | length 42.7
  Top Layer w0.5: R3.2@106.199,52.375 106.362,52.538 106.474,52.65 106.5,52.65 106.659,52.809 107.45,53.6 107.45,57.007 107.743,57.3 110.725,57.3 111.525,58.1 111.525,70.425 112.55,71.45 112.55,73.528 112.257,73.821 U1.6@110.392,73.821 ; R3.2@106.199,52.435 R3.2 105,52.05 104.2,52.85 104.2,58.546 106.237,60.584 P1.3@106.237,64.15
o11: P2.6 R8.2 U2.7 | length 13.6
  Top Layer w0.5: R8.2@46.351,70.171 47.979,70.171 49.64,68.51 49.64,67.275 ; P2.6 49.64,66.175 49.64,67.275 ; U2.7@55.709,68.459 55.709,68.285 55.714,68.28 55.714,67.639 55.35,67.275 49.64,67.275
o12: P2.5 R7.2 U2.5 | length 17.1
  Top Layer w0.5: P2.5 50.882,64.035 51.175,64.328 51.175,65.907 51.543,66.275 57.618,66.275 58.23,66.887 U2.5 ; U2.5@58.175,69.303 R7.2@62.125,69.303
o13: P2.3 R4.2 U2.6 | length 34.7
  Top Layer w0.5: P2.3@47.4,64.094 47.4,62.075 47.965,61.51 51.035,61.51 52.2,62.675 52.2,64.957 52.493,65.25 61.14,65.25 61.99,66.1 R4.2 64.075,68.05 64.075,70.432 63.457,71.05 57.606,71.05 56.979,70.423 56.979,68.71 U2.6@56.95,68.681
o14: P2.1 R2.2 U2.3 | length 19.4
  Top Layer w0.5: P2.1 45.56,62.39 47.925,60.025 51.375,60.025 53.2,61.85 53.2,63.957 53.493,64.25 56.667,64.25 56.96,63.957 U2.3@56.96,61.666
o21: D19.2 D20.1 R6.1 | length 4.9
  Top Layer w0.5: R6.1@111.377,81.375 114.725,81.375 ; D20.1@114.725,80.77 114.725,81.375 ; 114.725,82.349 114.725,81.375
o22: D10.2 D11.1 R5.1 | length 15.9
  Top Layer w0.5: R5.1@108.676,55.55 111.85,55.55 112.95,56.65 112.95,63.575 113.439,64.064 114.376,64.064 D11.1 ; D11.1@114.5,64.278 D10.2
o23: D14.2 D15.1 R3.1 | length 15.5
  Top Layer w0.5: R3.1@108.645,52.05 108.645,51.27 107.475,50.1 107.475,46.956 107.768,46.663 114.75,46.663 D14.2
o31: D21.2 D22.1 R8.1 | length 10.8
  Top Layer w0.5: R8.1 43.9,70.37 43.9,74.328 42.925,75.303 42.925,76.874 43.564,77.513 44.1,77.513 D22.1 ; D22.1@44.275,77.738 44.3,77.763 44.3,79.624 D21.2@44.275,79.649
o32: D17.2 D18.1 R7.1 | length 21.9
  Top Layer w0.5: R7.1 80.16,69.382 81.203,70.425 88.732,70.425 89.025,70.718 89.025,79.77 88.732,80.063 D17.2@87.7,80.063 ; D18.1@87.35,78.274 D17.2
o33: D12.2 D13.1 R4.1 | length 23
  Top Layer w0.5: R4.1@80.085,66.05 80.575,65.56 80.575,64.45 82.15,62.875 82.15,59.3 83.1,58.35 85,58.35 85.675,57.675 85.675,50.325 86.687,49.313 87.25,49.313 D12.2 ; D13.1@87.45,47.561 D12.2@87.45,49.088
o34: D7.2 D8.1 R2.1 | length 16.4
  Top Layer w0.5: D8.1@43.7,47.15 D7.2@43.7,48.71 ; D7.2 43.855,48.799 D7.2@43.944,48.71 ; D7.2@43.725,48.49 D7.2@43.879,48.644 ; D8.1@43.861,46.924 44.774,46.924 45.425,47.575 45.425,58.25 44.6,59.075 44.6,59.205 44.355,59.45 R2.1@44.225,59.45
o41: Q1.1 R11.1 R13.1 | length 4.5
  Top Layer w0.7: Q1.1@170.275,69.25 170.275,68.28 170.28,68.276 170.28,67.87 170.455,67.695 R13.1@170.985,67.695 ; R13.1@170.84,67.67 173.205,67.67
o42: Q2.1 R12.1 R17.1 | length 4.6
  Top Layer w0.6: R12.1@177.404,67.989 177.573,67.82 R12.1@177.95,67.82 ; Q2.1@177.575,69.175 177.575,68.195 R12.1@177.723,68.048 ; R12.1@177.95,67.811 180.709,67.811 R17.1@180.75,67.77
o43: Q3.1 R10.1 R21.1 | length 5.8
  Top Layer w0.6: R10.1@184.75,67.995 184.75,69.2 Q3.1@184.85,69.3 ; R10.1@184.975,67.77 R10.1@185.3,67.77 ; R10.1@185.425,67.945 185.15,67.67 185.425,67.67 R21.1@188.929,67.67
o44: Q4.1 R9.1 R25.1 | length 5.1
  Top Layer w0.6: Q4.1@192.325,69.2 192.332,69.193 R9.1@192.332,68.07 ; R9.1@192.475,67.745 R9.1@192.8,67.745 ; R9.1@192.575,67.925 R9.1@192.912,67.925 ; R9.1@192.8,67.925 R25.1@196.109,67.925
of1: K1.4 T1.5 | length 7.5
  Top Layer w2.5: T1.5 172.5,46.494 172.5,52.025 K1.4
of2: K2.4 T1.4 | length 7.6
  Top Layer w2.5: T1.4 179.219,51.419 K2.4
of3: K3.4 T1.3 | length 7.3
  Top Layer w2.5: T1.3@186.575,46.425 186.575,47.185 187.625,48.235 187.625,52.45 K3.4
of4: K4.4 T1.2 | length 7.3
  Top Layer w2.5: T1.2@193.869,46.531 193.782,46.618 193.782,47.183 194.75,48.152 194.75,52.2 K4.4
RF: P5.2 P5.3 U1.4 | length 86.8
  Top Layer w0.5: U1.4@103.25,72.535 103.234,72.551 102.585,72.551 102.569,72.535 101.768,72.535 101.475,72.242 101.475,41.55 102.175,40.85 145.582,40.85 145.875,41.143 145.875,45.057 145.582,45.35 P5.2@143.273,45.35 ; P5.2 143.175,45.825 143.175,47.965 P5.3
RF2: P4.2 P4.3 U2.4 | length 9.5
  Top Layer w0.5: U2.4@58.249,62.152 58.249,61.301 58.95,60.6 62.175,60.6 62.686,61.111 62.686,61.871 P4.2 ; P4.2@63.19,62.45 P4.3@65.45,62.45
VCC: C6.2 C7.2 C8.1 C10.2 D6.1 P1.2 P2.2 P3.2 P4.4 P5.4 R14.2 R15.2 R16.2 R18.2 R19.2 R20.2 R22.2 R23.1 R23.2 R24.1 R24.2 R26.1 R26.2 U1.1 U2.1 U4.4 U5.4 U7.1 | length 373.5
  Top Layer w0.5: R14.2@43.638,55.025 42,55.025 ; P2.2@45.5,66.1 42.225,66.1 ; U2.1 54.401,62.356 54.401,61.276 52.05,58.925 47.125,58.925 ; C7.2@65.85,64.849 R24.1@68.494,64.849 ; R24.1@67.977,64.574 67.977,62.668 P4.4 ; R24.2 68.676,67.425 71.6,67.425 75.331,63.694 75.331,62.494 U5.4 75.35,60.125 73.425,58.2 65.225,58.2 64.35,57.325 48.725,57.325 47.125,58.925 ; R16.2 87.729,55.522 88.957,55.522 89.25,55.229 89.25,43.1 87.8,41.65 43.775,41.65 42,43.425 42,55.025 ; R19.2@87.65,85.851 87.375,86.126 87.375,87.282 87.107,87.55 44.243,87.55 43.95,87.257 43.95,85.701 43.732,85.482 42.982,85.482 41.925,84.425 41.925,74.05 42.225,73.75 42.225,66.1 ; C8.1 103.155,76.426 103.201,76.38 U1.1 105.382,76.38 105.675,76.087 105.675,71.925 104.285,70.535 P1.2 103.065,66.09 102.7,65.725 102.7,49.143 102.993,48.85 R18.2 R18.2@106.469,48.85 ; C8.1@103.18,81.35 103.115,81.415 103.115,85.21 103.024,85.3 103.024,87.649 103.475,88.1 108.925,88.1 108.95,88.075 ; R20.2@108.95,85.496 108.95,88.075 ; U4.4@138.575,80.352 138.564,80.363 138.564,81.315 138.575,81.326 138.575,81.8 137.35,83.025 137.35,87.4 137.35,87.6 ; R23.2@140.949,87.125 140.949,87.345 140.695,87.6 137.35,87.6 ; R23.1@143.545,87.125 143.545,86.8 144.6,85.745 144.6,71.699 143.45,70.549 143.45,68.718 143.157,68.425 141.15,68.425 139.375,66.65 139.375,52.55 141.186,50.739 P5.4@144.125,50.739 ; 42,55.025 42,60.755 ; 42,60.755 45.295,60.755 47.125,58.925 ; 42,60.755 42,65.987 42.113,66.1 42.225,66.1 ; 108.95,88.075 136.875,88.075 137.35,87.6
  Top Layer w0.6: R26.2@162.2,74.85 C10.2@162.2,77.3
  Top Layer w0.7: P3.2 161.935,71.88 162.11,72.055 R26.1@162.2,72.055 ; U7.1@162.25,82.675 162.25,80.75 D6.1 162.275,80.375 162.275,77.3 C10.2@162.425,77.15
pads on no net: P1.1 P4.5 P5.5 U1.3 U4.5 U4.6 U4.7 U4.8 U5.5 U5.6 U5.7 U5.8
copper on no net: | length 544.5
  Top Layer w0.5: 42.35,40.65 76.175,40.65 89.025,40.65 90.25,41.875 90.25,68.425 82.7,68.425 82.307,68.032 82.307,67.618 82.6,67.325 88.407,67.325 88.7,67.032 88.7,66.468 88.407,66.175 82.643,66.175 82.35,65.882 82.35,65.443 82.643,65.15 88.35,65.15 88.643,64.857 88.643,64.443 88.349,64.149 84.218,64.149 83.925,63.856 83.925,60.576 84.276,60.225 88.357,60.225 88.65,60.518 88.65,62.082 88.357,62.375 86.7,62.375 ; 42.35,88.55 89.275,88.55 90.025,87.8 90.025,68.425 ; 55.4,79.175 57.65,79.175 63.62,73.205 64.965,73.205 65.642,72.528 68.076,70.094 71.494,70.094 71.494,69.283 ; 55.7,49.775 61.9,55.975 64.8,55.975 65.95,57.125 76.3,57.125 77.025,57.85 77.025,63.525 72.81,67.74 72.81,69.275 ; 74.08,69.275 74.08,68.448 74.145,68.383 74.145,67.855 78.175,63.825 78.175,52.387 75.75,49.962 ; 75.35,69.275 75.35,77.648 76.727,79.025 ; 125.625,84.025 132.9,76.75 141.525,76.75 141.9,76.375 142.325,75.95 142.325,75.176 142.336,75.165 142.336,74.312 142.325,74.301 ; 126.562,64.95 133.162,71.55 135.75,71.55 137.245,73.045 137.805,73.605 138.499,73.605 138.545,73.651 138.545,74.275 ; 126.675,48.4 126.95,48.125 128.682,49.857 134.375,55.55 135.5,55.55 136.799,56.849 136.799,69.349 139.796,72.346 139.796,74.351
  Top Layer w0.6: 143.375,66.385 142.868,65.878 141.101,65.878 140.75,65.526 140.75,53.226 141.101,52.875 141.599,52.875 141.95,53.226 141.95,63.799 142.301,64.15 142.799,64.15 143.15,63.799 143.15,53.376 143.501,53.025 143.999,53.025 144.35,53.376 144.35,63.774 144.701,64.125 145.349,64.125 145.7,63.774 145.7,47.076 146.076,46.7 146.574,46.7 146.925,47.051 146.925,64.625 146.925,65.663 145.775,65.663 145.775,66.763 147.511,66.763 147.511,67.863 145.724,67.863 145.724,68.963 147.511,68.963 147.511,70.063 145.724,70.063 145.724,71.163 147.511,71.163 147.511,72.263 145.724,72.263 145.724,73.363 147.511,73.363 147.511,74.463 145.724,74.463 145.724,75.563 147.511,75.563 147.511,76.663 145.724,76.663 145.724,77.763 147.511,77.763 147.511,78.863 145.724,78.863 145.724,79.963 147.511,79.963 147.511,81.063 145.724,81.063 145.724,82.163 147.511,82.163 147.511,83.263 145.724,83.263 145.724,84.363 147.511,84.363 147.511,85.463 145.724,85.463 145.724,86.563 147.2,86.563 147.2,87.663 ; 147.2,87.82 147.284,87.904 148.359,87.904 148.711,87.552 148.711,43.436 147.9,42.625 ; 147.2,87.663 146.925,87.663 146.925,87.816 147.072,87.963 147.072,87.791 147.2,87.663

## Keep-outs
Keep-Out Layer:
  lines w1: 0,-0.381 0,95.825 263.225,95.825 263.225,0 0,0

## Other copper
Top Layer:
  rectangle: 66.8,43.775 83.775,55.95
  rectangle: 46.55,43.8 64.075,56.25
  rectangle: 67.1,73 84.575,85.65
  rectangle: 47.15,72.95 64.65,85.625
  region: 117.525,87.325 117.525,74.25 135.475,74.25 135.475,87.325
  region: 117.575,71.8 117.575,58.1 135.55,58.1 135.55,71.8
  region: 117.65,55.8 117.65,42.7 135.7,42.7 135.7,55.8
  pour cut-out: 137.323,73.45 116.116,73.45 116.116,89.139 137.184,89.139
  region net GND: 46.762,66.05 46.762,68.5 47.012,68.75 47.962,68.75 48.237,68.475 48.237,65.9
  region net GND: 105.487,66.165 105.487,68.615 105.737,68.865 106.687,68.865 106.962,68.59 106.962,66.015
  region net GND: 138.05,51.6 140.525,49.125 140.825,48.825 140.825,41.9 137.1,41.9 137.1,50.65
  region net GND: 163.115,66.625 163.115,70.5 163.39,70.775 164.39,70.775 164.615,70.55 164.615,66.625
  region net o2: 108.925,64.05 108.925,61.6 108.675,61.35 107.725,61.35 107.45,61.625 107.45,64.2
  region net VCC: 103.547,66.165 103.547,68.615 103.797,68.865 104.747,68.865 105.022,68.59 105.022,66.015
  region net VCC: 45.485,65.237 42.287,65.237 42,65.525 42,66.575 42.137,66.713 45.635,66.713
  region net VCC: 161.175,66.625 161.175,70.5 161.775,71.1 162.125,71.1 162.675,70.55 162.675,66.625
  region net o1: 107.425,66.225 107.425,68.675 107.675,68.925 108.625,68.925 108.9,68.65 108.9,66.075
  region net o1: 105.025,64.075 105.025,61.625 104.775,61.375 103.825,61.375 103.55,61.65 103.55,64.225
  region net o14: 46.297,63.96 46.297,61.773 46.077,61.553 43.175,61.552 43.175,63.96
  region net NetP3_5: 166.581,64.135 166.581,61.345 166.306,61.07 165.306,61.07 165.081,61.295 165.081,64.135
  region net NetP3_3: 164.635,64.335 164.635,60.46 164.025,59.85 163.695,59.85 163.135,60.41 163.135,64.335
  region net NetP3_1: 162.695,64.335 162.695,60.46 162.235,60 161.605,60 161.195,60.41 161.195,64.335
  region net NetP3_6: 165.055,66.625 165.055,69.105 165.3,69.35 166.325,69.35 166.555,69.12 166.555,66.625
  region net o12: 49.514,64.763 51.175,64.763 51.425,64.512 51.425,63.563 51.15,63.288 49.364,63.288
  region net o13: 48.238,63.96 48.238,61.51 47.987,61.26 47.69,61.26 46.762,62.187 46.762,64.11
  region net o11: 48.702,66.05 48.702,68.5 48.952,68.75 49.902,68.75 50.177,68.475 50.177,65.9
  region net o3: 106.975,64.075 106.975,61.625 106.725,61.375 105.775,61.375 105.5,61.65 105.5,64.225
  region net faz: 171.749,60.624 163.138,52.012 165.575,49.575 173.175,57.175 195.225,57.175 198.975,57.175 198.975,57.675 196,60.65 195.35,60.65
  region net faz: 159.945,54.55 159.945,46.955 165.105,41.795 166.676,41.795 167.425,42.544 167.425,54.025 166.9,54.55
  region net of3: 183.567,50.117 183.567,42.43 184.202,41.795 188.139,41.795 188.901,42.557 188.901,53.675 187.125,53.675
  region net of4: 192.711,41.795 192.838,41.922 192.711,41.795 191.06,41.795 190.552,42.303 190.552,50.253 194.232,53.425 196.013,53.425 196.013,42.938 194.87,41.795 191.695,41.795
  region net nol: 200.145,41.795 205.03,46.68 205.03,51.42 204.425,52.025 202.325,52.025 198.045,47.745 198.045,42.049 198.299,41.795
  region net of1: 169.597,51.103 169.597,42.43 170.232,41.795 174.169,41.795 174.725,42.351 174.725,53.175 171.917,53.175
  region net of2: 176.697,50.872 176.697,42.555 177.332,41.92 181.269,41.92 181.825,42.476 181.825,53.3 179.416,53.3
  region net o23: 111.815,46.81 103.66,46.81 102.6,45.75 102.6,43.35 104.075,41.875 111.825,41.875 112.775,42.825 112.775,45.85
  pour cut-out: 137.466,57.325 116.243,57.325 116.243,72.675 137.33,72.675
  pour cut-out: 137.541,40.625 116.243,40.625 116.243,56.575 137.4,56.575

## Silkscreen, mask and mechanical layers (free items; w line width, h text height)
Top Overlay:
  drawing of 48 lines, arcs and shapes, not listed
Bottom Overlay:
  drawing of 45 lines, arcs and shapes, not listed
Top Paste:
  region: 164.638,66.662 164.638,69.113 164.413,69.338 163.363,69.338 163.163,69.138 163.163,66.687
  region: 166.562,66.437 166.562,69.088 166.337,69.313 165.287,69.313 165.087,69.113 165.087,66.462
  region: 161.191,64.065 161.191,61.506 161.416,61.281 162.466,61.281 162.666,61.481 162.666,64.04
  region: 163.129,64.147 163.129,61.494 163.354,61.269 164.404,61.269 164.604,61.469 164.604,64.122
  region: 165.079,64.148 165.079,61.494 165.304,61.269 166.354,61.269 166.554,61.469 166.554,64.123
  region: 162.688,66.737 162.688,69.163 162.463,69.388 161.413,69.388 161.213,69.188 161.213,66.762
Mechanical 2:
  lines w0.2: 41.25,40.02 41.25,89.7 ; 41.25,89.725 91.025,89.725 91.025,39.97 41.302,39.934 ; 159.31,84.31 164.45,89.45 ; 159.31,84.335 164.45,89.475 ; 99.96,39.998 99.96,89.8 149.7,89.8 149.7,40.034 99.96,39.998
  lines w0.254: 159.31,84.31 159.31,46.865 165.142,41.033 200.533,41.033 205.665,46.165 205.665,84.24 ; 159.31,84.335 159.31,46.89 165.142,41.058 200.533,41.058 205.665,46.19 205.665,84.265 ; 164.45,89.45 200.45,89.45 205.662,84.238 ; 164.45,89.475 200.45,89.475 205.662,84.263

## Text inside footprints (layer, text, board x,y; h text height)
Buzzer1: Top Overlay "+" at 267.154,7.825 h1.52
Buzzer2: Top Overlay "+" at 280.68,7.825 h1.52
P1: Top Overlay "6" at 110.289,65.882 h1.27; Top Overlay "5" at 110.289,63.342 h1.27; Top Overlay "2" at 101.145,65.882 h1.27; Top Overlay "1" at 101.653,63.342 h1.27
P2: Top Overlay "6" at 51.564,65.767 h1.27; Top Overlay "5" at 51.564,63.227 h1.27; Top Overlay "2" at 42.561,65.863 h1.27; Top Overlay "1" at 42.736,63.238 h1.27
P3: Top Overlay "6" at 167.939,66.242 h1.27; Top Overlay "5" at 167.939,63.702 h1.27; Top Overlay "2" at 158.795,66.242 h1.27; Top Overlay "1" at 159.303,63.702 h1.27
U3: Top Overlay "+" at 201.99,59.699 h0.81 r270; Top Overlay "-" at 199.7,59.7 h0.81 r270